# Altium PCB main_V3.0.PcbDoc
Units mm, origin at the board's own origin, x right, y up, seen from the top; angles counter-clockwise.
Board outline 32 x 32 mm, 2 copper layers (Top Layer, Bottom Layer); 31 components, 31 nets, 92 pads, 35 vias.
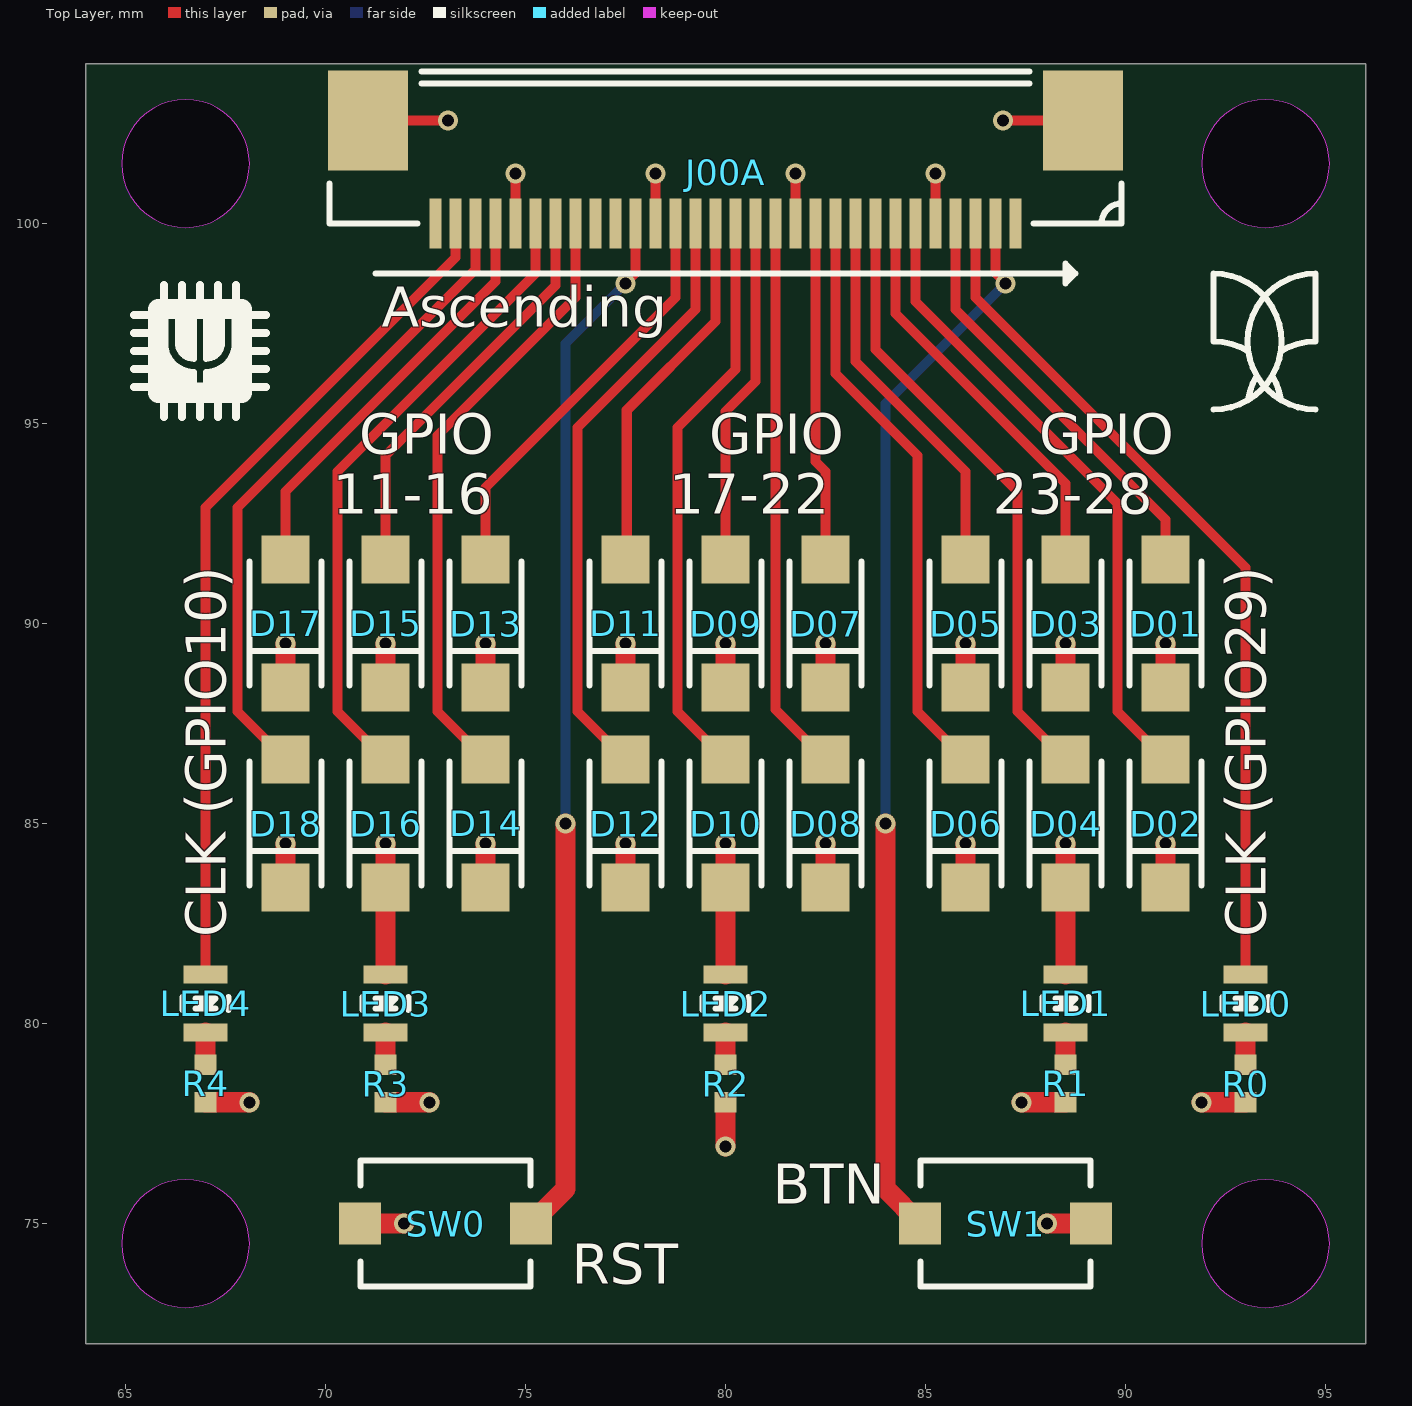
[diagram p0: Top Layer view]
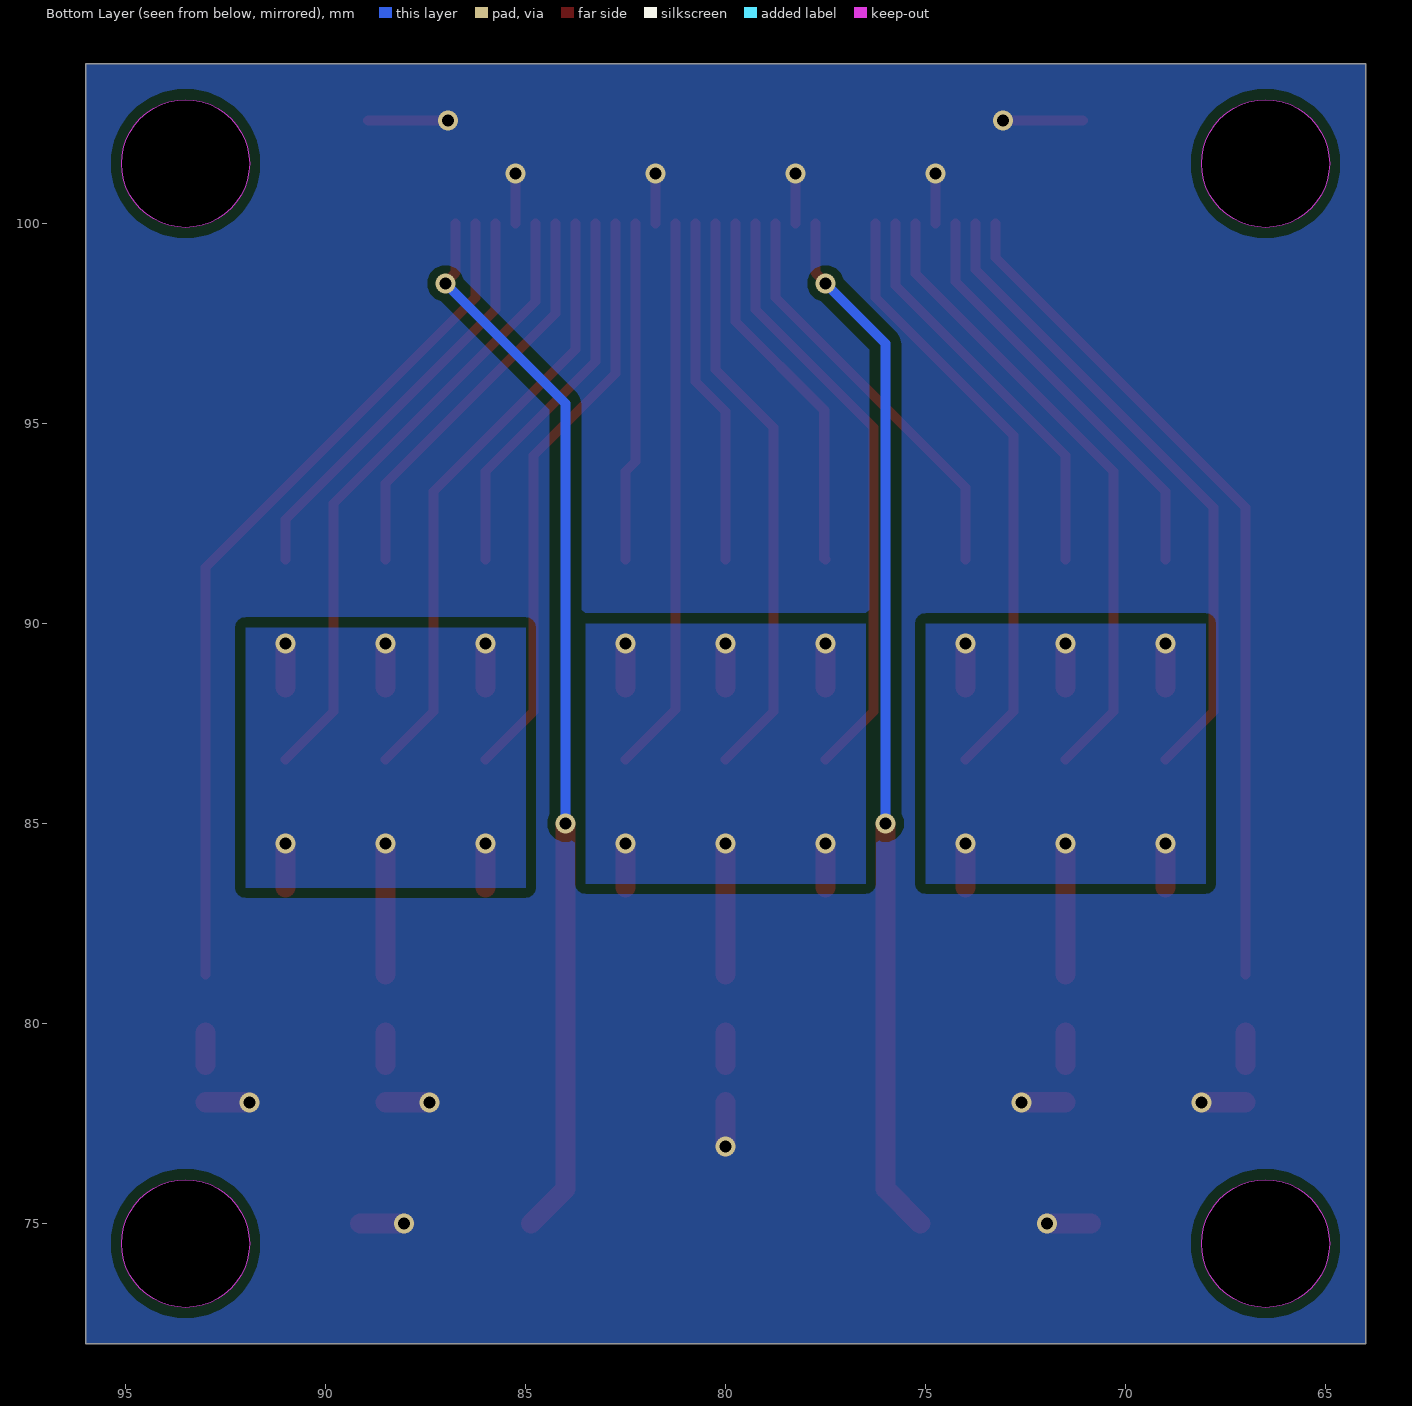
[diagram p1: Bottom Layer view, seen from below]
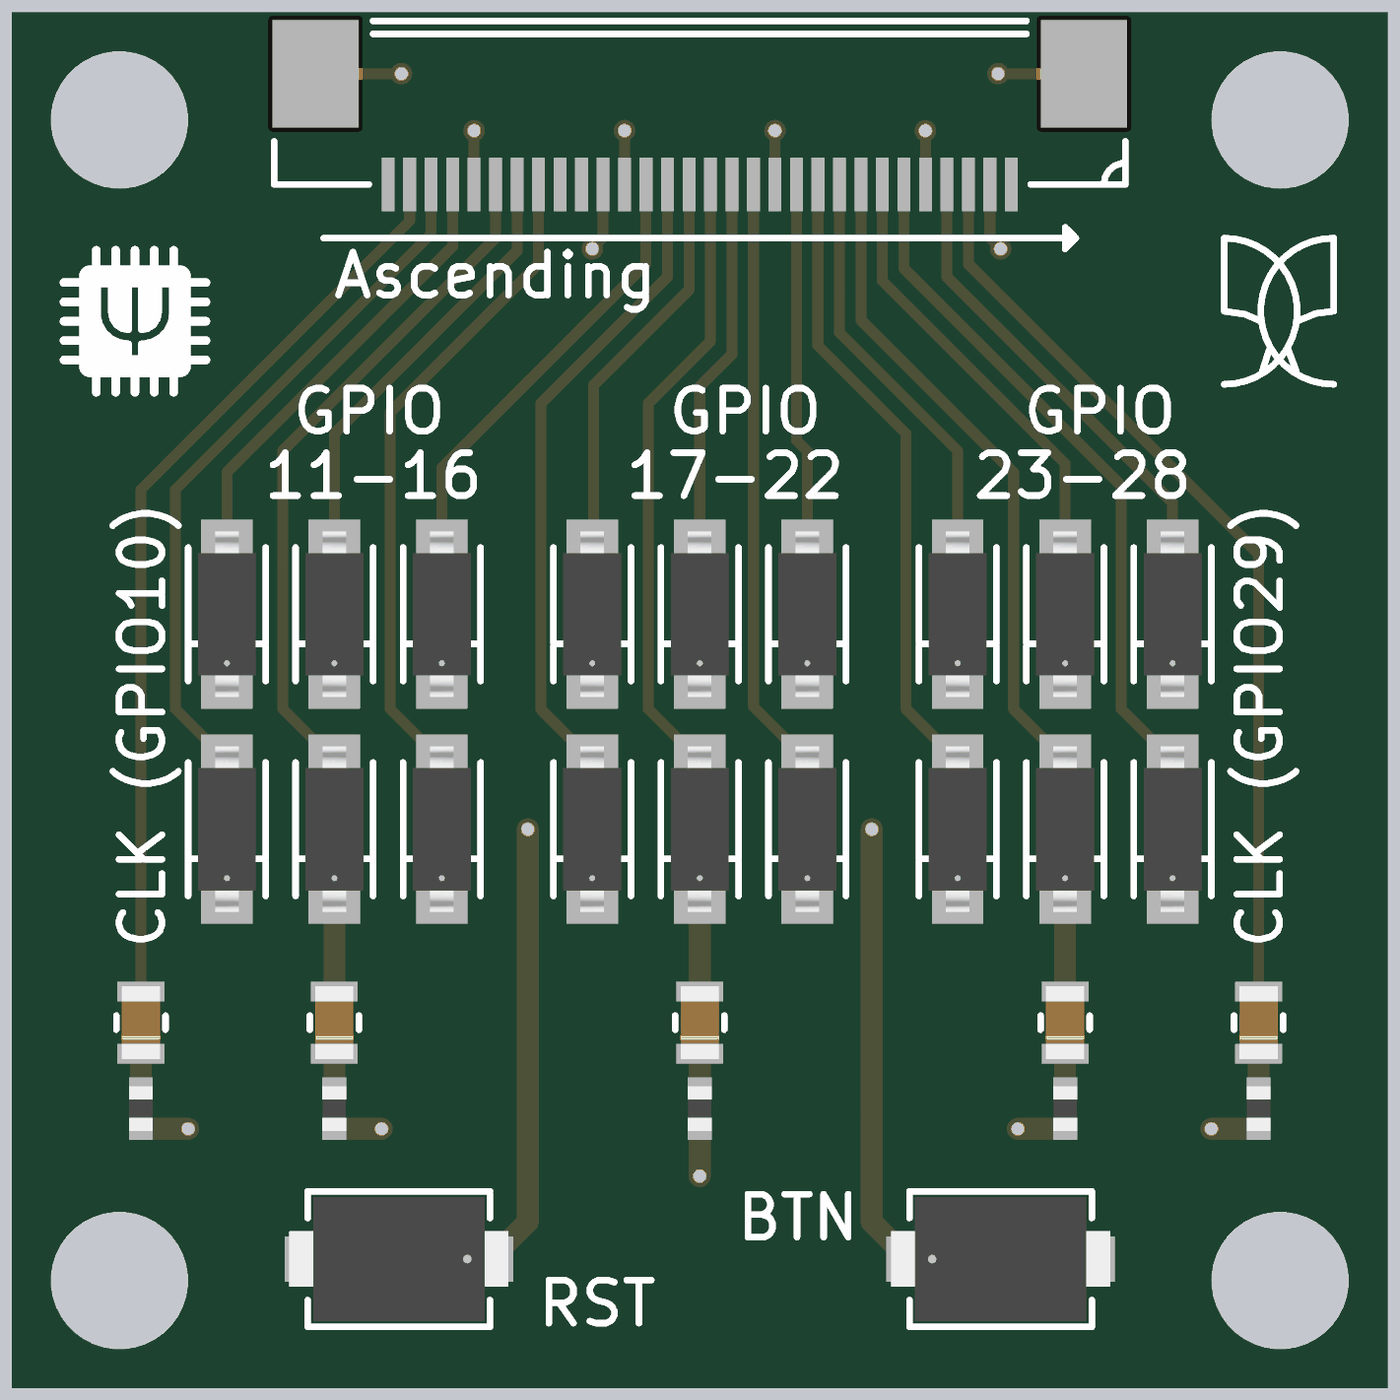
[diagram p2: 3D render of the assembled board from above, using the file's embedded part models]

## Layer stack, top to bottom
Top Solder: solder mask 0.0102, Solder Resist, Dk 3.5
Top Layer: signal copper 0.0356
Dielectric 1: dielectric 0.32, FR-4, Dk 4.8
Bottom Layer: signal copper 0.0356
Bottom Solder: solder mask 0.0102, Solder Resist, Dk 3.5

## Board outline
64,72 64,104 96,104 96,72
cut-out: 64.9,101.5 ccw(c66.5,101.5) 66.5,99.9 ccw(c66.5,101.5) 68.1,101.5 ccw(c66.5,101.5) 66.5,103.1 ccw(c66.5,101.5)
cut-out: 64.9,74.5 ccw(c66.5,74.5) 66.5,72.9 ccw(c66.5,74.5) 68.1,74.5 ccw(c66.5,74.5) 66.5,76.1 ccw(c66.5,74.5)
cut-out: 91.9,74.5 ccw(c93.5,74.5) 93.5,72.9 ccw(c93.5,74.5) 95.1,74.5 ccw(c93.5,74.5) 93.5,76.1 ccw(c93.5,74.5)
cut-out: 91.9,101.5 ccw(c93.5,101.5) 93.5,99.9 ccw(c93.5,101.5) 95.1,101.5 ccw(c93.5,101.5) 93.5,103.1 ccw(c93.5,101.5)

## Design rules (kind name [scope] priority, off if disabled: settings)
Clearance [All] p1: gap=0.254 ignorepadtopadclearanceinfootprint=FALSE except(0.102: Arc-Arc Arc-Track Arc-SMDPad Track-Track Track-SMDPad; 0.152: SMDPad-SMDPad SMDPad-Hole; 0.2: Via-Fill Via-Poly Via-Region; 0.203: Arc-Via Arc-Hole Track-Via Track-Hole Via-Via; 0.279: Arc-THPad Track-THPad; 0.457: THPad-THPad)
HoleSize [All] p1: absolutevalues=TRUE maxlimit=10 minlimit=0.025 maxpercent=80.000 minpercent=20.000
PolygonConnect [All] p1: thpad.connectstyle=Relief thpad.reliefconductorwidth=0.254 thpad.reliefentries=4 thpad.polygonreliefangle="90 Angle" thpad.airgapwidth=0.254 smdpad.connectstyle=Relief smdpad.reliefconductorwidth=0.254 smdpad.reliefentries=4 smdpad.polygonreliefangle="90 Angle" smdpad.airgapwidth=0.254 via.connectstyle=Direct via.reliefconductorwidth=0.254 via.reliefentries=4 via.polygonreliefangle="90 Angle" via.airgapwidth=0.254
RoutingVias [All] p1: holewidth=0.3 width=0.5 viastyle="Through Hole" minholewidth=0.2 minwidth=0.45 maxholewidth=0.711 maxwidth=1.27
SolderMaskExpansion [All] p1: expansion=0.102 istentingtop=FALSE
SupplyNets "Schematic Supply Nets" [InNet('GND')] p1: voltage=0.000
Width [All] p1: maxlimit=2.54 minlimit=0.102 preferedwidth=0.254 minimp=50.000000 maximp=50.000000 favimp=50.000000
29 further rules are at their usual default settings.

## Components (designator, comment, footprint, x,y, rotation, side; value= is the part's Value field where it differs from the comment)
D01 "1N4148W" SOD123_DIO 91,90 r90 top
D02 "1N4148W" SOD123_DIO 91,85 r90 top
D03 "1N4148W" SOD123_DIO 88.5,90 r90 top
D04 "1N4148W" SOD123_DIO 88.5,85 r90 top
D05 "1N4148W" SOD123_DIO 86,90 r90 top
D06 "1N4148W" SOD123_DIO 86,85 r90 top
D07 "1N4148W" SOD123_DIO 82.5,90 r90 top
D08 "1N4148W" SOD123_DIO 82.5,85 r90 top
D09 "1N4148W" SOD123_DIO 80,90 r90 top
D10 "1N4148W" SOD123_DIO 80,85 r90 top
D11 "1N4148W" SOD123_DIO 77.5,90 r90 top
D12 "1N4148W" SOD123_DIO 77.5,85 r90 top
D13 "1N4148W" SOD123_DIO 74,90 r90 top
D14 "1N4148W" SOD123_DIO 74,85 r90 top
D15 "1N4148W" SOD123_DIO 71.5,90 r90 top
D16 "1N4148W" SOD123_DIO 71.5,85 r90 top
D17 "1N4148W" SOD123_DIO 69,90 r90 top
D18 "1N4148W" SOD123_DIO 69,85 r90 top
J00A "FPC-05F-20PH20" FPC-05F-30PH20 80,100 r180 top
LED0 "XL-1608UWC-04" LED_XL-1608_XLG 93,80.5 r90 top
LED1 "XL-1608UWC-04" LED_XL-1608_XLG 88.5,80.5 r90 top
LED2 "XL-1608UWC-04" LED_XL-1608_XLG 80,80.5 r90 top
LED3 "XL-1608UWC-04" LED_XL-1608_XLG 71.5,80.5 r90 top
LED4 "XL-1608UWC-04" LED_XL-1608_XLG 67,80.5 r90 top
R0 "R0402" RES0402_CPF_TYCO_TYC 93,78.5 r270 top
R1 "R0402" RES0402_CPF_TYCO_TYC 88.5,78.5 r270 top
R2 "R0402" RES0402_CPF_TYCO_TYC 80,78.5 r270 top
R3 "R0402" RES0402_CPF_TYCO_TYC 71.5,78.5 r270 top
R4 "R0402" RES0402_CPF_TYCO_TYC 67,78.5 r270 top
SW0 "TS-1088-AR02016" SW_TS-1088_XNP 73,75 r180 top
SW1 "TS-1088-AR02016" SW_TS-1088_XNP 87,75 r0 top

## Footprints (in the part's own frame and the unit in brackets; to place one, negate y for a bottom-side part, rotate by r counter-clockwise, add the part's x,y. Pads: shape width x height; smd on the part's side, far side on the other; paste and mask are expansions set on the pad)
FPC-05F-30PH20 [mm]
  rect 0.3x1.25 smd mask+0: 1(-7.25,0) 2(-6.75,0) 3(-6.25,0) 4(-5.75,0) 5(-5.25,0) 6(-4.75,0) 7(-4.25,0) 8(-3.75,0) 9(-3.25,0) 10(-2.75,0) 11(-2.25,0) 12(-1.75,0) 13(-1.25,0) 14(-0.75,0) 15(-0.25,0) 16(0.25,0) 17(0.75,0) 18(1.25,0) 19(1.75,0) 20(2.25,0) 21(2.75,0) 22(3.25,0) 23(3.75,0) 24(4.25,0) 25(4.75,0) 26(5.25,0) 27(5.75,0) 28(6.25,0) 29(6.75,0) 30(7.25,0)
  rect 2x2.5 smd: P1(-8.94,-2.575) P2(8.94,-2.575)
  silkscreen extent -9.9,-3.8 9.9,0
LED_XL-1608_XLG [mil]
  rect 18x43 smd paste+0 mask+0: 1(-28.5,0) 2(28.5,0)
  silkscreen extent -6,-22 6,22, body extent -34,-18 34,18, height 20
RES0402_CPF_TYCO_TYC [mil]
  rect 20x22 smd paste+0 mask+0: 1(-18.5,0) 2(18.5,0)
  body extent -21,-11 21,11, height 14
SOD123_DIO [mm]
  rect 1.2x1.2 smd paste+0 mask+0: A(1.6,0) K(-1.6,0)
  silkscreen extent -1.55,-0.9 1.55,0.9, body extent -1.92,-0.67 1.92,0.67, height 0.81
SW_TS-1088_XNP [mm]
  rect 1.045x1.045 smd paste+0 mask+0: 1(-2.135,0) 2(2.135,0)
  silkscreen extent -2.12,-1.57 2.12,1.57, body extent -2.55,-1.45 2.55,1.45, height 2.01

## Part data
D01 D02 D03 D04 D05 D06 D07 D08 D09 D10 D11 D12 D13 D14 D15 D16 D17 D18: "Small Signal Diode"
J00A: library part FPC-05F-30PH20, "30 Pin 0.5 Pitch FPC connector"
LED0 LED1 LED2 LED3 LED4: "No Description Available", Manufacturer_Name=XINGLIGHT, Copyright="Copyright (C) 2025 Ultra Librarian. All rights reserved.", Manufacturer_Part_Number=XL-1608UWC-04
R0 R1 R2 R3 R4: "CPF 0402 RL", Manufacturer_Name="TE Connectivity", Manufacturer_Part_Number=CPF0402B33RE1, Copyright="Copyright (C) 2025 Ultra Librarian. All rights reserved.", Datasheet=https://www.te.com/commerce/DocumentDelivery/DDEController?Action=srchrtrv&DocNm=1773200&DocType=Data+Sheet&DocLang=English&PartCntxt=1-1879208-3&DocFormat=pdf
SW0 SW1: "Description", Manufacturer_Name=Xunpu, Copyright="Copyright (C) 2026 Ultra Librarian. All rights reserved.", Manufacturer_Part_Number=TS-1088-AR02016

## Via types
v1: diameter 0.5, hole 0.3, Top Layer to Bottom Layer, tented both sides, 35 vias

## Nets (pads, with @x,y where several pads share a name; then routed paths per layer and width w, separated by ;. In a path a pad name is that pad's centre, name@x,y a point inside that pad or via, vN(x,y) a via of type N, cw(c..) or ccw(c..) an arc to the next point about the centre after c; other vN are vias at no path point)
BOOT_N: J00A.2 SW1.1 | length 26.7
  Top Layer w0.254: J00A.2 86.75,98.772 87,98.522 v1(87,98.5)
  Top Layer w0.508: v1(84,85) 84,75.865 SW1.1
  Bottom Layer w0.254: v1(84,85) 84,95.5 v1(87,98.5)
CLK0: J00A.3 LED0.2 | length 21.6
  Top Layer w0.254: J00A.3 86.25,98.15 93,91.4 LED0.2
CLK1: J00A.29 LED4.2 | length 21.4
  Top Layer w0.254: LED4.2 67,92.9 73.25,99.15 J00A.29
GND: J00A.5 J00A.12 J00A.19 J00A.26 J00A.P1 J00A.P2 R0.2 R1.2 R2.2 R3.2 R4.2 SW0.2 SW1.2 | length 16.7
  Top Layer w0.254: J00A.P2 v1(73.06,102.575) ; J00A.26 v1(74.75,101.25) ; J00A.19 v1(78.25,101.25) ; J00A.12 v1(81.75,101.25) ; J00A.5 v1(85.25,101.25) ; v1(86.94,102.575) J00A.P1
  Top Layer w0.508: R4.2 v1(68.1,78.03) ; SW0.2 v1(71.965,75) ; R3.2 v1(72.6,78.03) ; v1(80,76.93) R2.2 ; v1(87.4,78.03) R1.2 ; v1(88.035,75) SW1.2 ; v1(91.9,78.03) R0.2
NetD01_A: D01.A J00A.4 | length 10.6
  Top Layer w0.254: J00A.4 85.75,97.85 91,92.6 D01.A
NetD02_A: D02.A J00A.6 | length 16
  Top Layer w0.254: J00A.6 84.75,98.05 89.8,93 89.8,87.8 D02.A
NetD03_A: D03.A J00A.7 | length 10.2
  Top Layer w0.254: J00A.7 84.25,97.75 88.5,93.5 D03.A
NetD04_A: D04.A J00A.8 | length 15.4
  Top Layer w0.254: J00A.8 83.75,96.85 87.3,93.3 87.3,87.8 D04.A
NetD05_A: D05.A J00A.9 | length 9.5
  Top Layer w0.254: J00A.9 83.25,96.55 86,93.8 D05.A
NetD06_A: D06.A J00A.10 | length 14.7
  Top Layer w0.254: J00A.10 82.75,96.25 84.8,94.2 84.8,87.8 D06.A
NetD07_A: D07.A J00A.11 | length 8.5
  Top Layer w0.254: J00A.11 82.25,94.05 82.5,93.8 D07.A
NetD08_A: D08.A J00A.13 | length 13.9
  Top Layer w0.254: J00A.13 81.25,87.85 D08.A
NetD09_A: D09.A J00A.14 | length 8.7
  Top Layer w0.254: D09.A 80,95.3 80.75,96.05 J00A.14
NetD10_A: D10.A J00A.15 | length 14.5
  Top Layer w0.254: D10.A 78.8,87.8 78.8,94.9 80.25,96.35 J00A.15
NetD11_A: D11.A J00A.16 | length 9.3
  Top Layer w0.254: D11.A 77.532,91.632 77.532,95.332 79.75,97.55 J00A.16
NetD12_A: D12.A J00A.17 | length 15.1
  Top Layer w0.254: D12.A 76.3,87.8 76.3,94.9 79.25,97.85 J00A.17
NetD13_A: D13.A J00A.18 | length 10.4
  Top Layer w0.254: D13.A 74,93.4 78.75,98.15 J00A.18
NetD14_A: D14.A J00A.23 | length 15.3
  Top Layer w0.254: D14.A 72.8,87.8 72.8,94.7 76.25,98.15 J00A.23
NetD15_A: D15.A J00A.24 | length 10.2
  Top Layer w0.254: D15.A 71.5,94.2 75.75,98.45 J00A.24
NetD16_A: D16.A J00A.25 | length 15.9
  Top Layer w0.254: D16.A 70.3,87.8 70.3,93.8 75.25,98.75 J00A.25
NetD17_A: D17.A J00A.27 | length 10.6
  Top Layer w0.254: D17.A 69,93.3 74.25,98.55 J00A.27
NetD18_A: D18.A J00A.28 | length 16.4
  Top Layer w0.254: D18.A 67.8,87.8 67.8,92.9 73.75,98.85 J00A.28
NetLED0_1: LED0.1 R0.1 | length 0.8
  Top Layer w0.508: R0.1 LED0.1
NetLED1_1: LED1.1 R1.1 | length 0.8
  Top Layer w0.508: R1.1 LED1.1
NetLED2_1: LED2.1 R2.1 | length 0.8
  Top Layer w0.508: R2.1 LED2.1
NetLED3_1: LED3.1 R3.1 | length 0.8
  Top Layer w0.508: R3.1 LED3.1
NetLED4_1: LED4.1 R4.1 | length 0.8
  Top Layer w0.508: R4.1 LED4.1
ROT0: D01.K D02.K D03.K D04.K D05.K D06.K LED1.2 | length 8.8
  Top Layer w0.508: D06.K v1(86,84.5) ; D05.K v1(86,89.5) ; LED1.2 D04.K v1(88.5,84.5) ; D03.K v1(88.5,89.5) ; D02.K v1(91,84.5) ; D01.K v1(91,89.5)
ROT1: D07.K D08.K D09.K D10.K D11.K D12.K LED2.2 | length 8.8
  Top Layer w0.508: D12.K v1(77.5,84.5) ; D11.K v1(77.5,89.5) ; LED2.2 D10.K v1(80,84.5) ; D09.K v1(80,89.5) ; D08.K v1(82.5,84.5) ; D07.K v1(82.5,89.5)
ROT2: D13.K D14.K D15.K D16.K D17.K D18.K LED3.2 | length 8.8
  Top Layer w0.508: D18.K v1(69,84.5) ; D17.K v1(69,89.5) ; LED3.2 D16.K v1(71.5,84.5) ; D15.K v1(71.5,89.5) ; D14.K v1(74,84.5) ; D13.K v1(74,89.5)
RUN: J00A.20 SW0.1 | length 26.1
  Top Layer w0.254: v1(77.5,98.5) 77.5,98.522 77.75,98.772 J00A.20
  Top Layer w0.508: SW0.1 76,75.865 v1(76,85)
  Bottom Layer w0.254: v1(76,85) 76,97 v1(77.5,98.5)
pads on no net: J00A.1 J00A.21 J00A.22 J00A.30

## Polygon pours and split planes (outlines as drawn)
GND on Bottom Layer "NONET_L-01_P-001" (solid, pour order 3): 64,104 96,104 96,72 64,72
ROT2 on Bottom Layer "NONET_L-01_P-001" (solid, pour order 2): 68,90 75,90 75,83.5 68,83.5
ROT0 on Bottom Layer "NONET_L-01_P-001" (solid, pour order 1): 85,89.9 92,89.9 92,83.4 85,83.4
ROT1 on Bottom Layer "NONET_L-01_P-001" (solid, pour order 0): 76.5,90 83.5,90 83.5,83.5 76.5,83.5

## Silkscreen, mask and mechanical layers (free items; w line width, h text height)
Top Overlay:
  lines w0.152: 65.986,97.016 ccw(c66.711,97.016) 66.711,96.291 66.711,95.716 ; 66.111,95.716 66.111,96.516 ; 66.211,95.716 66.211,96.416 ; 66.311,95.716 66.311,96.366 ; 66.311,97.916 66.311,97.016 ccw(c66.711,97.016) 66.711,96.616 66.711,97.916 ; 66.411,95.716 66.411,96.316 ; 66.411,96.816 66.411,97.916 ; 66.511,95.716 66.511,96.291 ; 66.511,96.741 66.511,97.916 ; 66.611,95.716 66.611,96.291 ; 66.611,96.716 66.611,97.916 ; 67.011,95.716 67.011,96.291 ccw(c67.011,97.016) 67.736,97.016 ; 67.011,97.916 67.011,96.616 ccw(c67.011,97.016) 67.411,97.016 67.411,97.916 ; 67.111,95.716 67.111,96.291 ; 67.111,96.716 67.111,97.916 ; 67.211,95.716 67.211,96.291 ; 67.211,96.741 67.211,97.916 ; 67.311,95.716 67.311,96.316 ; 67.311,96.816 67.311,97.916 ; 67.411,95.716 67.411,96.366 ; 67.511,95.716 67.511,96.416 ; 67.611,95.716 67.611,96.516 ; 71.25,98.75 88.75,98.75 ; 92.2,95.35 ccw(c92.2,97.05) 92.2,98.75 92.2,97.05 cw(c92.2,95.35) 93.067,96.812 ; 93.067,95.588 cw(c94.75,95.35) 93.278,96.2 ; 93.672,96.2 cw(c92.2,95.35) 93.883,95.588 ; 93.883,96.812 cw(c94.75,95.35) 94.75,97.05 94.75,98.75 ccw(c94.75,97.05) 94.75,95.35 ; 88.75,98.75 88.5,99 88.5,98.5 88.75,98.75
  lines w0.203: 65.211,95.916 65.561,95.916 ; 65.211,96.366 65.561,96.366 ; 65.211,96.816 65.561,96.816 ; 65.211,97.266 65.561,97.266 ; 65.211,97.716 65.561,97.716 ; 65.961,95.166 65.961,95.516 ; 65.961,98.116 65.961,98.466 ; 66.411,95.166 66.411,95.516 ; 66.411,98.116 66.411,98.466 ; 66.861,95.166 66.861,95.516 ; 66.861,98.116 66.861,98.466 ; 67.311,95.166 67.311,95.516 ; 67.311,98.116 67.311,98.466 ; 67.761,95.166 67.761,95.516 ; 67.761,98.116 67.761,98.466 ; 68.161,95.916 68.511,95.916 ; 68.161,96.366 68.511,96.366 ; 68.161,96.816 68.511,96.816 ; 68.161,97.266 68.511,97.266 ; 68.161,97.716 68.511,97.716
  lines w0.508: 65.815,95.77 67.907,95.77 67.907,97.862 65.815,97.862 65.815,95.77
  text "Ascending" at 71.402,97.417 h1
  text "GPIO" at 70.849,94.25 h1
  text "GPIO" at 79.599,94.25 h1
  text "GPIO" at 87.849,94.25 h1
  text "11-16" at 70.182,92.75 h1
  text "17-22" at 78.599,92.75 h1
  text "23-28" at 86.682,92.75 h1
  text "CLK (GPIO10)" at 67.5,82.152 h1 r90
  text "CLK (GPIO29)" at 93.5,82.152 h1 r90
  text "BTN" at 81.182,75.5 h1
  text "RST" at 76.152,73.5 h1
Mechanical 1:
  the board outline again, w0.254
Drill Drawing:
  text ".Legend" at 97.754,73.262 h1.52

## Text inside footprints (layer, text, board x,y; h text height)
D01: Mechanical 13 "*" at 91.635,88.512 h1.27 r90
D02: Mechanical 13 "*" at 91.635,83.512 h1.27 r90
D03: Mechanical 13 "*" at 89.135,88.512 h1.27 r90
D04: Mechanical 13 "*" at 89.135,83.512 h1.27 r90
D05: Mechanical 13 "*" at 86.635,88.512 h1.27 r90
D06: Mechanical 13 "*" at 86.635,83.512 h1.27 r90
D07: Mechanical 13 "*" at 83.135,88.512 h1.27 r90
D08: Mechanical 13 "*" at 83.135,83.512 h1.27 r90
D09: Mechanical 13 "*" at 80.635,88.512 h1.27 r90
D10: Mechanical 13 "*" at 80.635,83.512 h1.27 r90
D11: Mechanical 13 "*" at 78.135,88.512 h1.27 r90
D12: Mechanical 13 "*" at 78.135,83.512 h1.27 r90
D13: Mechanical 13 "*" at 74.635,88.512 h1.27 r90
D14: Mechanical 13 "*" at 74.635,83.512 h1.27 r90
D15: Mechanical 13 "*" at 72.135,88.512 h1.27 r90
D16: Mechanical 13 "*" at 72.135,83.512 h1.27 r90
D17: Mechanical 13 "*" at 69.635,88.512 h1.27 r90
D18: Mechanical 13 "*" at 69.635,83.512 h1.27 r90